# Altium PCB PowerSplitter.PcbDoc
Units mm, origin at the board's own origin, x right, y up, seen from the top; angles counter-clockwise.
Board outline 31 x 31 mm, 2 copper layers (Top Layer, Bottom Layer), stack 0.579 mm thick; 4 components, 4 nets, 14 pads, 275 vias.
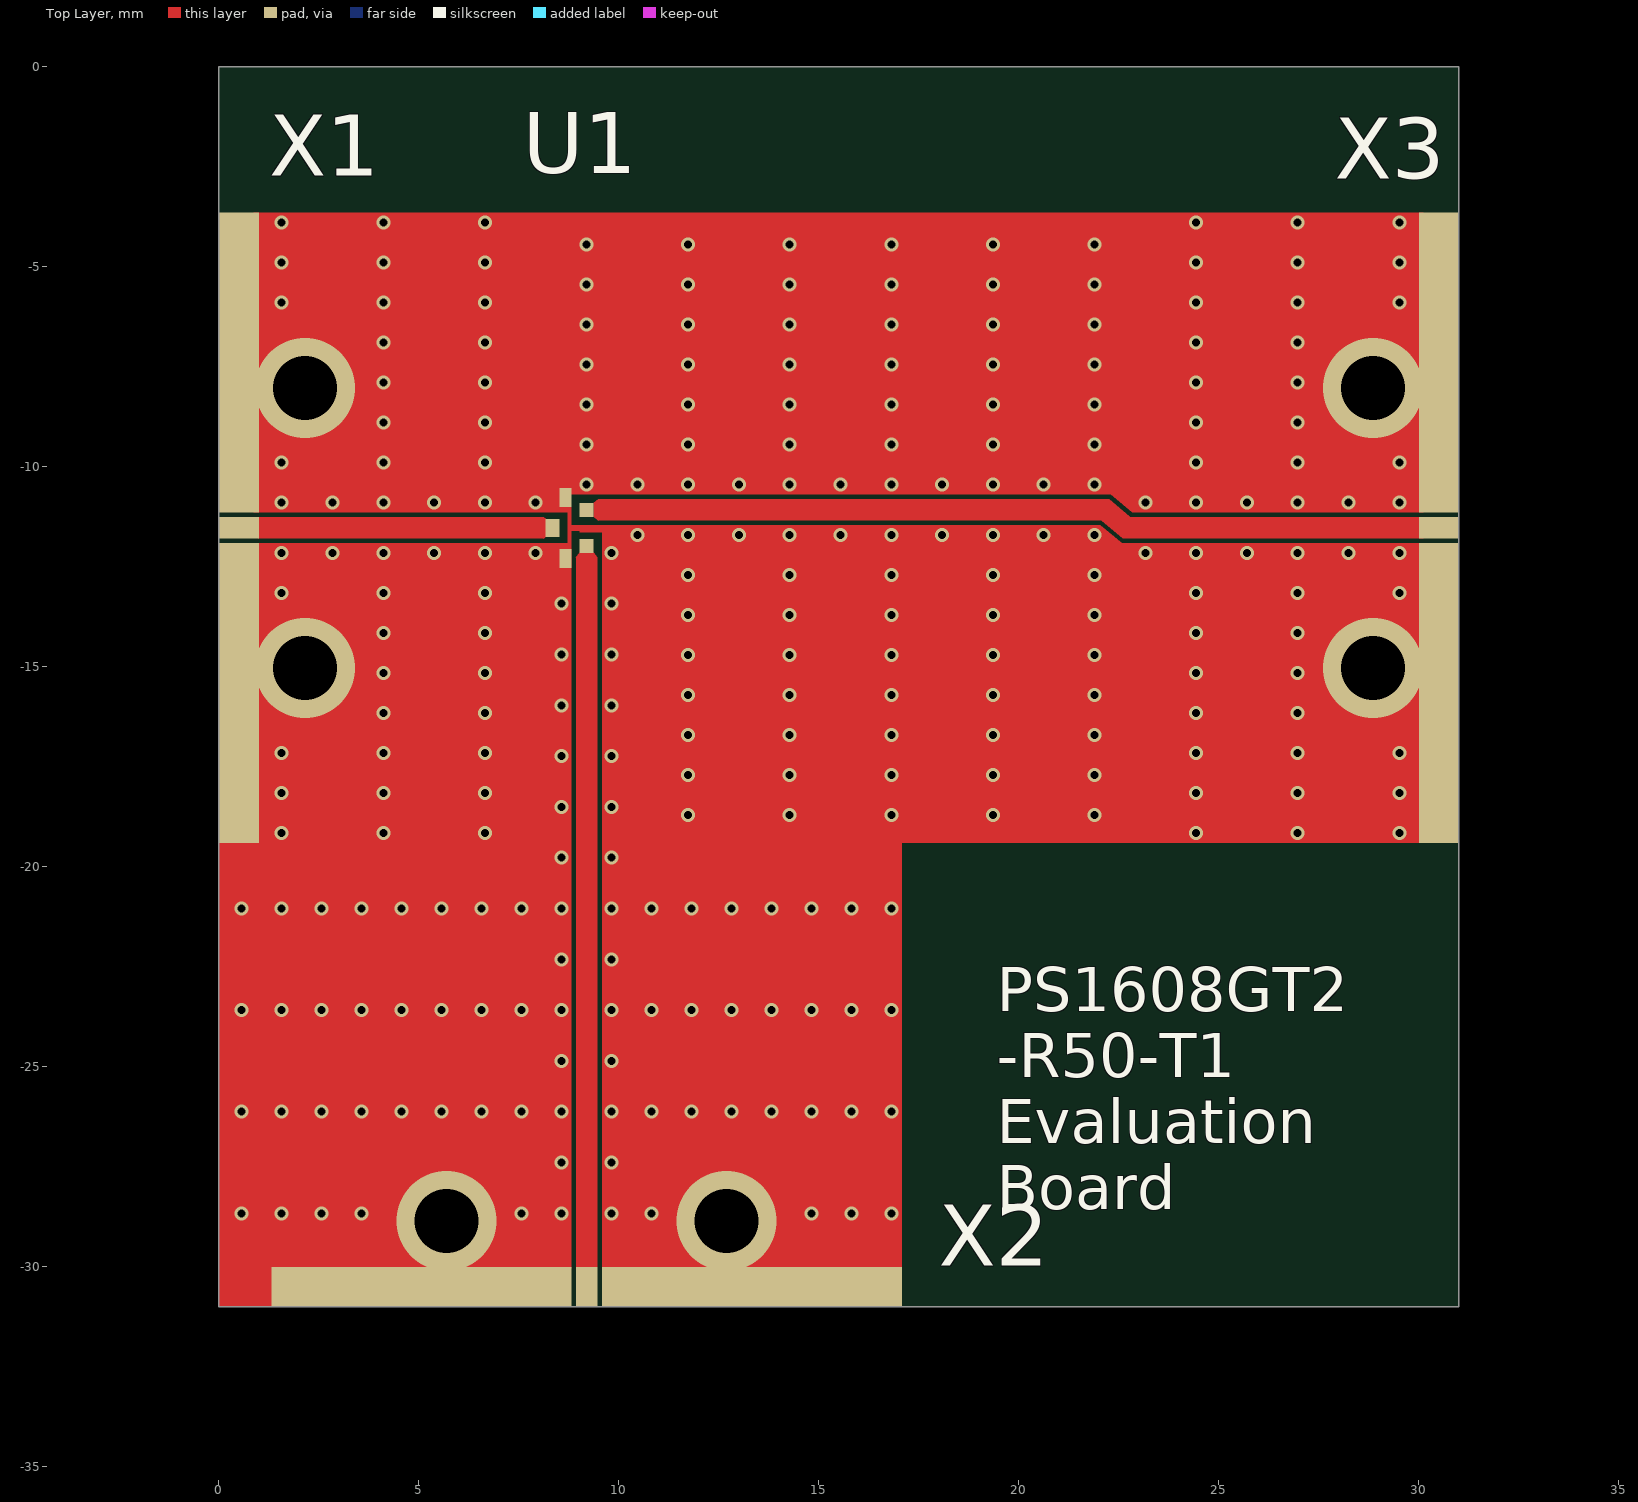
[diagram p0: Top Layer view]
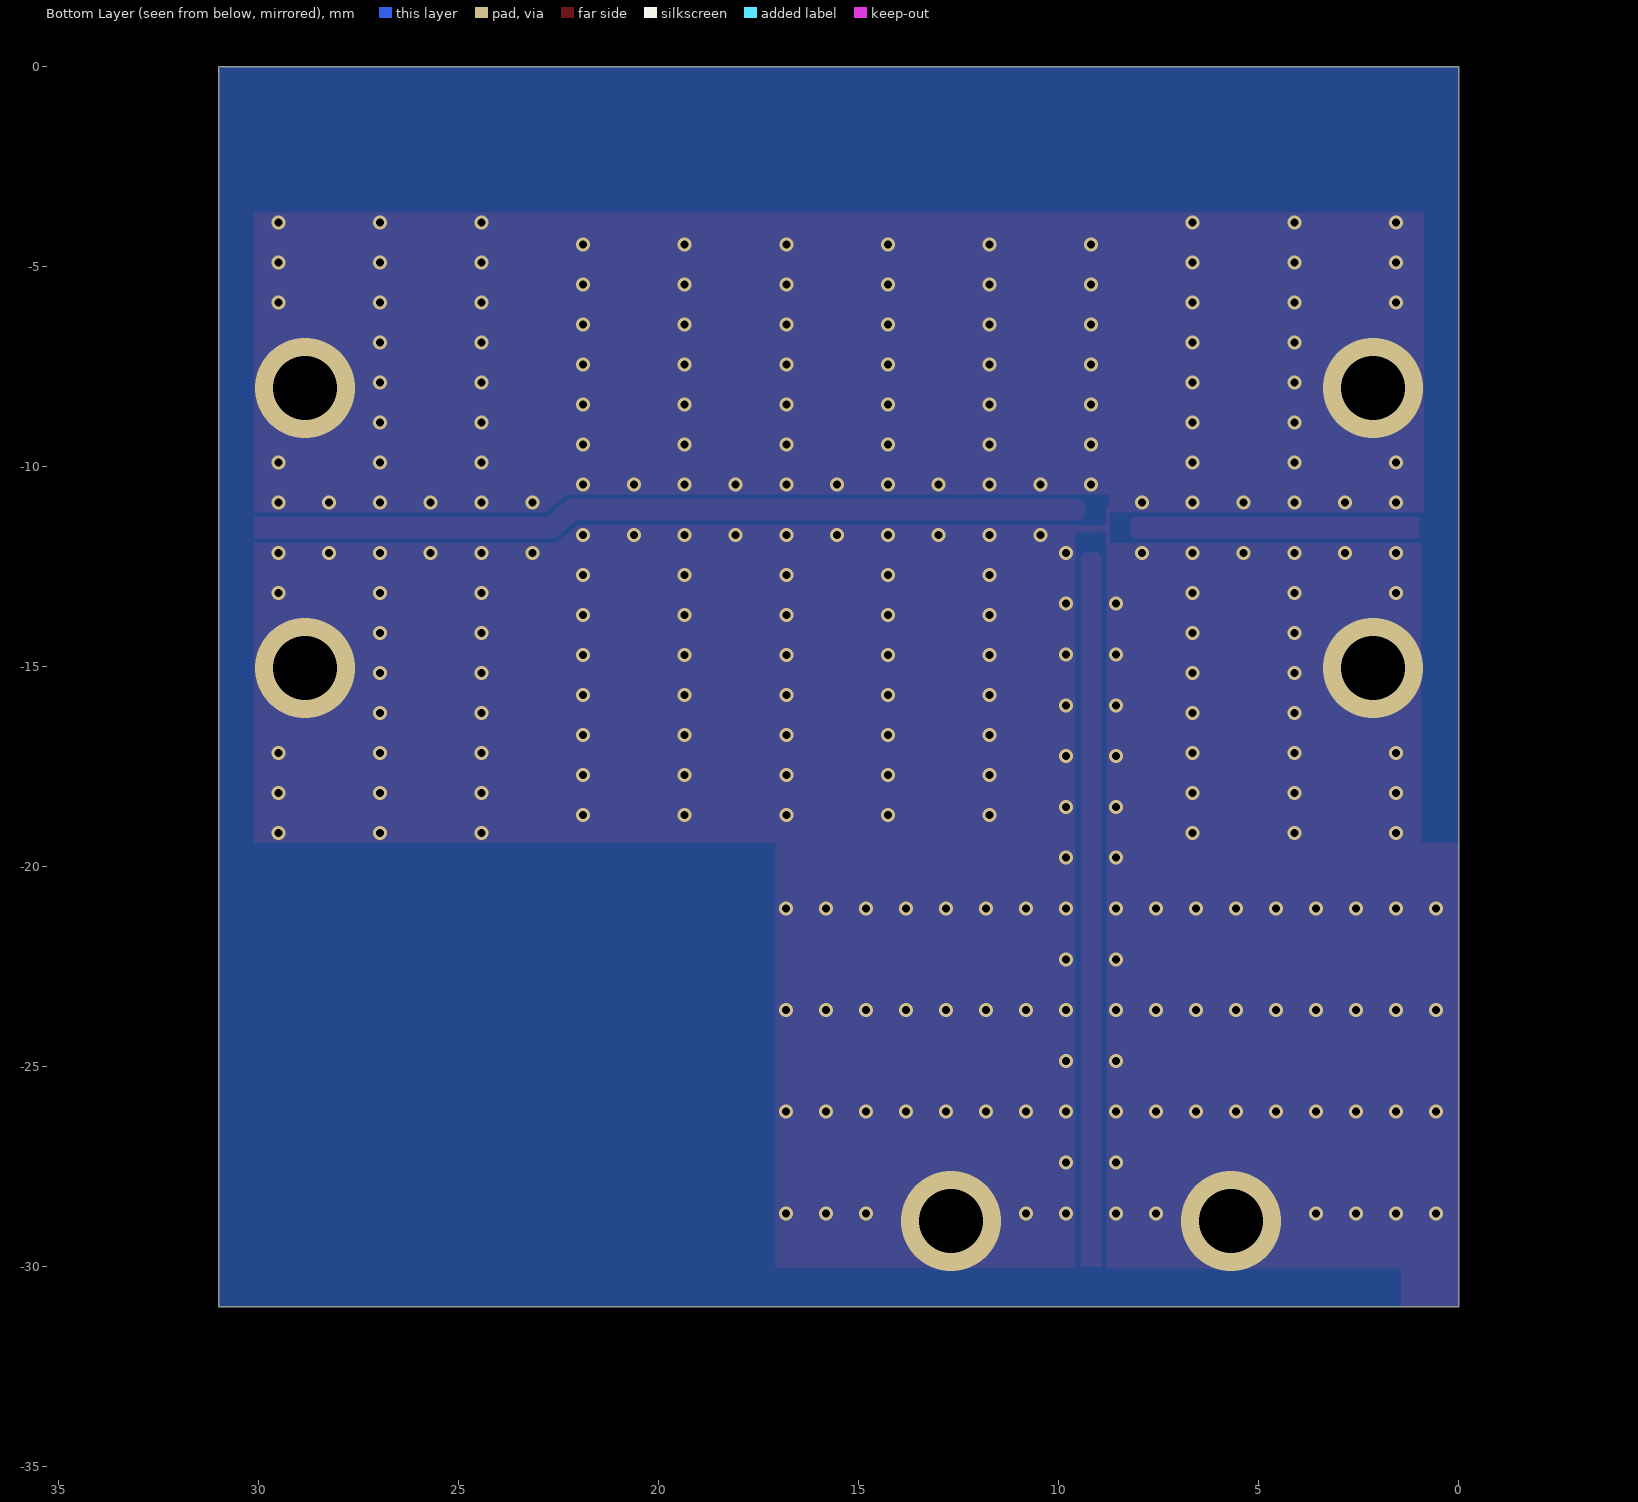
[diagram p1: Bottom Layer view, seen from below]

## Layer stack, top to bottom
Top Layer: signal copper 0.0356
Dielectric 1: dielectric 0.508, Rogers 4350B, Dk 3.48
Bottom Layer: signal copper 0.0356

## Board outline
0,0 31,0 31,-31 0,-31

## Design rules (kind name [scope] priority, off if disabled: settings)
Clearance [All] p1: gap=0.1 ignorepadtopadclearanceinfootprint=FALSE
ComponentClearance [All] p1 off: gap=0.254 collisioncheckmode=3 verticalgap=0.254 showdistances=FALSE
PolygonConnect [All] p1: connectstyle=Direct reliefconductorwidth=0.254 reliefentries=4 polygonreliefangle="90 Angle" airgapwidth=0.254
RoutingVias [All] p1: holewidth=0.711 width=1.27 viastyle="Through Hole" minholewidth=0.15 minwidth=0.15 maxholewidth=6.3 maxwidth=6.3
SolderMaskExpansion [All] p1: expansion=0.102 istentingtop=FALSE
SupplyNets "Schematic Supply Nets" [InNet('GND')] p1: voltage=0.000
Width [All] p1: maxlimit=0.254 minlimit=0.254 preferedwidth=0.254
29 further rules are at their usual default settings.

## Components (designator, comment, footprint, x,y, rotation, side; value= is the part's Value field where it differs from the comment)
U1 "PS1608GT2-R50-T1" PS1608GT2-R50-T1 8.77,-11.525 r90 top
X1 "Solder Pad" "CPW EDGE CONNECTOR" 0.5,-11.525 r90 top
X2 "Solder Pad" "CPW EDGE CONNECTOR" 9.195,-30.5 r180 top
X3 "Solder Pad" "CPW EDGE CONNECTOR" 30.5,-11.525 r270 top

## Footprints (in the part's own frame and the unit in brackets; to place one, negate y for a bottom-side part, rotate by r counter-clockwise, add the part's x,y. Pads: shape width x height; smd on the part's side, far side on the other; paste and mask are expansions set on the pad)
"CPW EDGE CONNECTOR" [mm]
  rect 0.538x1 smd paste-2539.97 mask+0: 1(0,0)
  rect 7.5x1 smd paste-1 mask+0: 2(-4.133,0)
  rect 7.5x1 smd paste-2539.97 mask+0: 3(4.133,0)
PS1608GT2-R50-T1 [mm]
  rect 0.45x0.35 smd: 1(0,0.425)
  rect 0.35x0.35 smd: 2(-0.45,-0.425) 3(0.45,-0.425)
  rect 0.475x0.3 smd: 4(-0.762,0.1) 5(0.762,0.1)
  Top Layer region: -0.075,-0.25 0.075,-0.25 0.075,-0.05 -0.075,-0.05
  Top Layer region: -0.525,-0.05 0.525,-0.05 0.525,0.05 -0.525,0.05
  body extent -0.8,-0.4 0.8,0.4, height 0.4

## Part data
U1: "Splitter, 0MHz Min, 20000MHz Max, 6dB Insertion Loss-Max", Manufacturer=Susumu, Operating Frequency-Max=20GHz, Operating Frequency-Min=0MHz, Supplier Part Number=408-2049-1-ND, Category="Chip SMD Resistors", Characteristic Impedance=50R, ComponentLink1Description=https://datasheet.ciiva.com:443/pdfs/VipMasterIC/IC/SUSU/SUSU-S-A0009163549/SUSU-S-A0009163549-1.pdf?src-supplier=IHS+Markit, ComponentLink1URL=https://datasheet.ciiva.com:443/pdfs/VipMasterIC/IC/SUSU/SUSU-S-A0009163549/SUSU-S-A0009163549-1.pdf?src-supplier=IHS+Markit, ComponentLink2Description=http://www.susumu.co.jp/common/pdf/n_catalog_partition31_en.pdf?src-supplier=Digikey, ComponentLink2URL=http://www.susumu.co.jp/common/pdf/n_catalog_partition31_en.pdf?src-supplier=Digikey, Construction=COMPONENT, JESD-609 Code=e3, Manufacturer Part Number=PS1608GT2-R50-T1, Pricing="1=2.27, 10=1.571, 50=1.1856, 100=1.0413, 500=0.875 (USD)", Reach SVHC Compliant=Yes, RF/Microwave Device Type=SPLITTER, RoHS=Yes, RoHS Compliant=Yes, Stock=9749, Supplier=Digikey, Terminal Finish=Tin, VSWR-Max=1.5
X1 X2 X3: library part "RF  CPW Solder Pad", "Solder pad for RF Coplanar Waveguide Rogers 4350B Thickness 0.020\" Copper 1oz"

## Via types
v1: diameter 0.35/0.35 (per signal layer), hole 0.2, Top Layer to Bottom Layer, 269 vias
v2: diameter 2.5, hole 1.6, Top Layer to Bottom Layer, tented both sides, 6 vias

## Nets (pads, with @x,y where several pads share a name; then routed paths per layer and width w, separated by ;. In a path a pad name is that pad's centre, name@x,y a point inside that pad or via, vN(x,y) a via of type N, cw(c..) or ccw(c..) an arc to the next point about the centre after c; other vN are vias at no path point)
GND: U1.4 U1.5 X1.2 X1.3 X2.2 X2.3 X3.2 X3.3
  other v1: 0.568,-28.662 1.568,-28.662 2.568,-28.662 3.568,-28.662 7.568,-28.662 8.568,-28.662 9.822,-28.662 10.822,-28.662 14.822,-28.662 15.822,-28.662 16.822,-28.662 8.568,-27.392 9.822,-27.392 0.568,-26.122 1.568,-26.122 2.568,-26.122 3.568,-26.122 4.568,-26.122 5.568,-26.122 6.568,-26.122 7.568,-26.122 8.568,-26.122 9.822,-26.122 10.822,-26.122 11.822,-26.122 12.822,-26.122 13.822,-26.122 14.822,-26.122 15.822,-26.122 16.822,-26.122 8.568,-24.852 9.822,-24.852 0.568,-23.582 1.568,-23.582 2.568,-23.582 3.568,-23.582 4.568,-23.582 5.568,-23.582 6.568,-23.582 7.568,-23.582 8.568,-23.582 9.822,-23.582 10.822,-23.582 11.822,-23.582 12.822,-23.582 13.822,-23.582 14.822,-23.582 15.822,-23.582 16.822,-23.582 8.568,-22.312 9.822,-22.312 0.568,-21.042 1.568,-21.042 2.568,-21.042 3.568,-21.042 4.568,-21.042 5.568,-21.042 6.568,-21.042 7.568,-21.042 8.568,-21.042 9.822,-21.042 10.822,-21.042 11.822,-21.042 12.822,-21.042 13.822,-21.042 14.822,-21.042 15.822,-21.042 16.822,-21.042 8.568,-19.772 9.822,-19.772 1.573,-19.152 4.113,-19.152 6.653,-19.152 24.433,-19.152 26.973,-19.152 29.513,-19.152 11.733,-18.702 14.273,-18.702 16.813,-18.702 19.353,-18.702 21.893,-18.702 8.568,-18.502 9.822,-18.502 1.573,-18.152 4.113,-18.152 6.653,-18.152 24.433,-18.152 26.973,-18.152 29.513,-18.152 11.733,-17.702 14.273,-17.702 16.813,-17.702 19.353,-17.702 21.893,-17.702 8.568,-17.232 9.822,-17.232 1.573,-17.152 4.113,-17.152 6.653,-17.152 24.433,-17.152 26.973,-17.152 29.513,-17.152 11.733,-16.702 14.273,-16.702 16.813,-16.702 19.353,-16.702 21.893,-16.702 4.113,-16.152 6.653,-16.152 24.433,-16.152 26.973,-16.152 8.568,-15.962 9.822,-15.962 11.733,-15.702 14.273,-15.702 16.813,-15.702 19.353,-15.702 21.893,-15.702 4.113,-15.152 6.653,-15.152 24.433,-15.152 26.973,-15.152 11.733,-14.702 14.273,-14.702 16.813,-14.702 19.353,-14.702 21.893,-14.702 8.568,-14.692 9.822,-14.692 4.113,-14.152 6.653,-14.152 24.433,-14.152 26.973,-14.152 11.733,-13.702 14.273,-13.702 16.813,-13.702 19.353,-13.702 21.893,-13.702 8.568,-13.422 9.822,-13.422 1.573,-13.152 4.113,-13.152 6.653,-13.152 24.433,-13.152 26.973,-13.152 29.513,-13.152 11.733,-12.702 14.273,-12.702 16.813,-12.702 19.353,-12.702 21.893,-12.702 1.573,-12.152 2.843,-12.152 4.113,-12.152 5.383,-12.152 6.653,-12.152 7.923,-12.152 9.822,-12.152 23.163,-12.152 24.433,-12.152 25.703,-12.152 26.973,-12.152 28.243,-12.152 29.513,-12.152 10.463,-11.702 11.733,-11.702 13.003,-11.702 14.273,-11.702 15.543,-11.702 16.813,-11.702 18.083,-11.702 19.353,-11.702 20.623,-11.702 21.893,-11.702 1.573,-10.898 2.843,-10.898 4.113,-10.898 5.383,-10.898 6.653,-10.898 7.923,-10.898 23.163,-10.898 24.433,-10.898 25.703,-10.898 26.973,-10.898 28.243,-10.898 29.513,-10.898 9.193,-10.448 10.463,-10.448 11.733,-10.448 13.003,-10.448 14.273,-10.448 15.543,-10.448 16.813,-10.448 18.083,-10.448 19.353,-10.448 20.623,-10.448 21.893,-10.448 1.573,-9.898 4.113,-9.898 6.653,-9.898 24.433,-9.898 26.973,-9.898 29.513,-9.898 9.193,-9.448 11.733,-9.448 14.273,-9.448 16.813,-9.448 19.353,-9.448 21.893,-9.448 4.113,-8.898 6.653,-8.898 24.433,-8.898 26.973,-8.898 9.193,-8.448 11.733,-8.448 14.273,-8.448 16.813,-8.448 19.353,-8.448 21.893,-8.448 4.113,-7.898 6.653,-7.898 24.433,-7.898 26.973,-7.898 9.193,-7.448 11.733,-7.448 14.273,-7.448 16.813,-7.448 19.353,-7.448 21.893,-7.448 4.113,-6.898 6.653,-6.898 24.433,-6.898 26.973,-6.898 9.193,-6.448 11.733,-6.448 14.273,-6.448 16.813,-6.448 19.353,-6.448 21.893,-6.448 1.573,-5.898 4.113,-5.898 6.653,-5.898 24.433,-5.898 26.973,-5.898 29.513,-5.898 9.193,-5.448 11.733,-5.448 14.273,-5.448 16.813,-5.448 19.353,-5.448 21.893,-5.448 1.573,-4.898 4.113,-4.898 6.653,-4.898 24.433,-4.898 26.973,-4.898 29.513,-4.898 9.193,-4.448 11.733,-4.448 14.273,-4.448 16.813,-4.448 19.353,-4.448 21.893,-4.448 1.573,-3.898 4.113,-3.898 6.653,-3.898 24.433,-3.898 26.973,-3.898 29.513,-3.898
  other v2: 5.695,-28.85 12.695,-28.85 2.15,-15.025 28.85,-15.025 2.15,-8.025 28.85,-8.025
IN: U1.1 X1.1
OUT_1: U1.2 X2.1
OUT_2: U1.3 X3.1

## Polygon pours and split planes (outlines as drawn)
GND on Bottom Layer "GND_L02_P000" (solid, pour order 0): 0,-31 31,-31 31,0 0,0

## Other copper
Top Layer:
  region net GND: 30.121,-11.908 16.825,-11.908 16.825,-19.408 30.121,-19.408
  rectangle net GND: 9.579,-18.958 22.034,-11.458
  region net OUT_1: 9.464,-30.01 9.464,-12.261 8.926,-12.261 8.926,-30.01
  rectangle net IN: 0.978,-11.794 8.118,-11.256
  rectangle net GND: 0.952,-30.036 8.812,-11.908
  region net GND: 17.079,-30.033 17.079,-18.865 9.579,-18.865 9.579,-30.033
  rectangle net GND: 0.868,-11.142 8.748,-3.642
  rectangle net OUT_2: 22.604,-11.794 30.121,-11.256
  rectangle net GND: 9.018,-11.644 9.585,-11.458
  rectangle net GND: 0,-31 1.441,-19.408
  rectangle net OUT_2: 9.482,-11.344 22.263,-10.806
  region net OUT_2: 21.917,-11.218 22.604,-11.794 22.949,-11.382 22.263,-10.806
  rectangle net GND: 8.516,-10.692 22.854,-3.642
  rectangle net GND: 22.835,-11.142 30.121,-3.642
  region net OUT_1: 9.02,-12.149 8.926,-12.261 9.464,-12.261 9.37,-12.149
  region net IN: 8.118,-11.256 8.171,-11.3 8.171,-11.75 8.118,-11.794
  region net GND: 22.599,-11.928 22.032,-11.459 22.032,-11.928
  region net GND: 22.292,-10.691 22.836,-11.141 22.836,-10.691
  region net OUT_2: 9.37,-10.9 9.482,-10.806 9.482,-11.344 9.37,-11.25

## Silkscreen, mask and mechanical layers (free items; w line width, h text height)
Top Overlay:
  text "PS1608GT2 / -R50-T1 / Evaluation / Board" at 19.45,-28.559 h1.1
Top Solder:
  region: 0,0 31,0 31,-31 0,-31
Bottom Solder:
  region: 0,0 31,0 31,-31 0,-31
Board (Mech4):
  the board outline again, w0.1